# Altium PCB SQUIDCtr_Rev0.PcbDoc (part 2 of 4)
Units mil, origin at the board's own origin, x right, y up, seen from the top; angles counter-clockwise.
Board outline 5765 x 2940 mil, 6 copper layers (Top Layer, Internal Plane 1, Mid-Layer 1, InternalPlane 2, Mid-Layer 2, Bottom Layer), stack 62.5 mil thick; 583 components, 307 nets, 1511 pads, 451 vias.
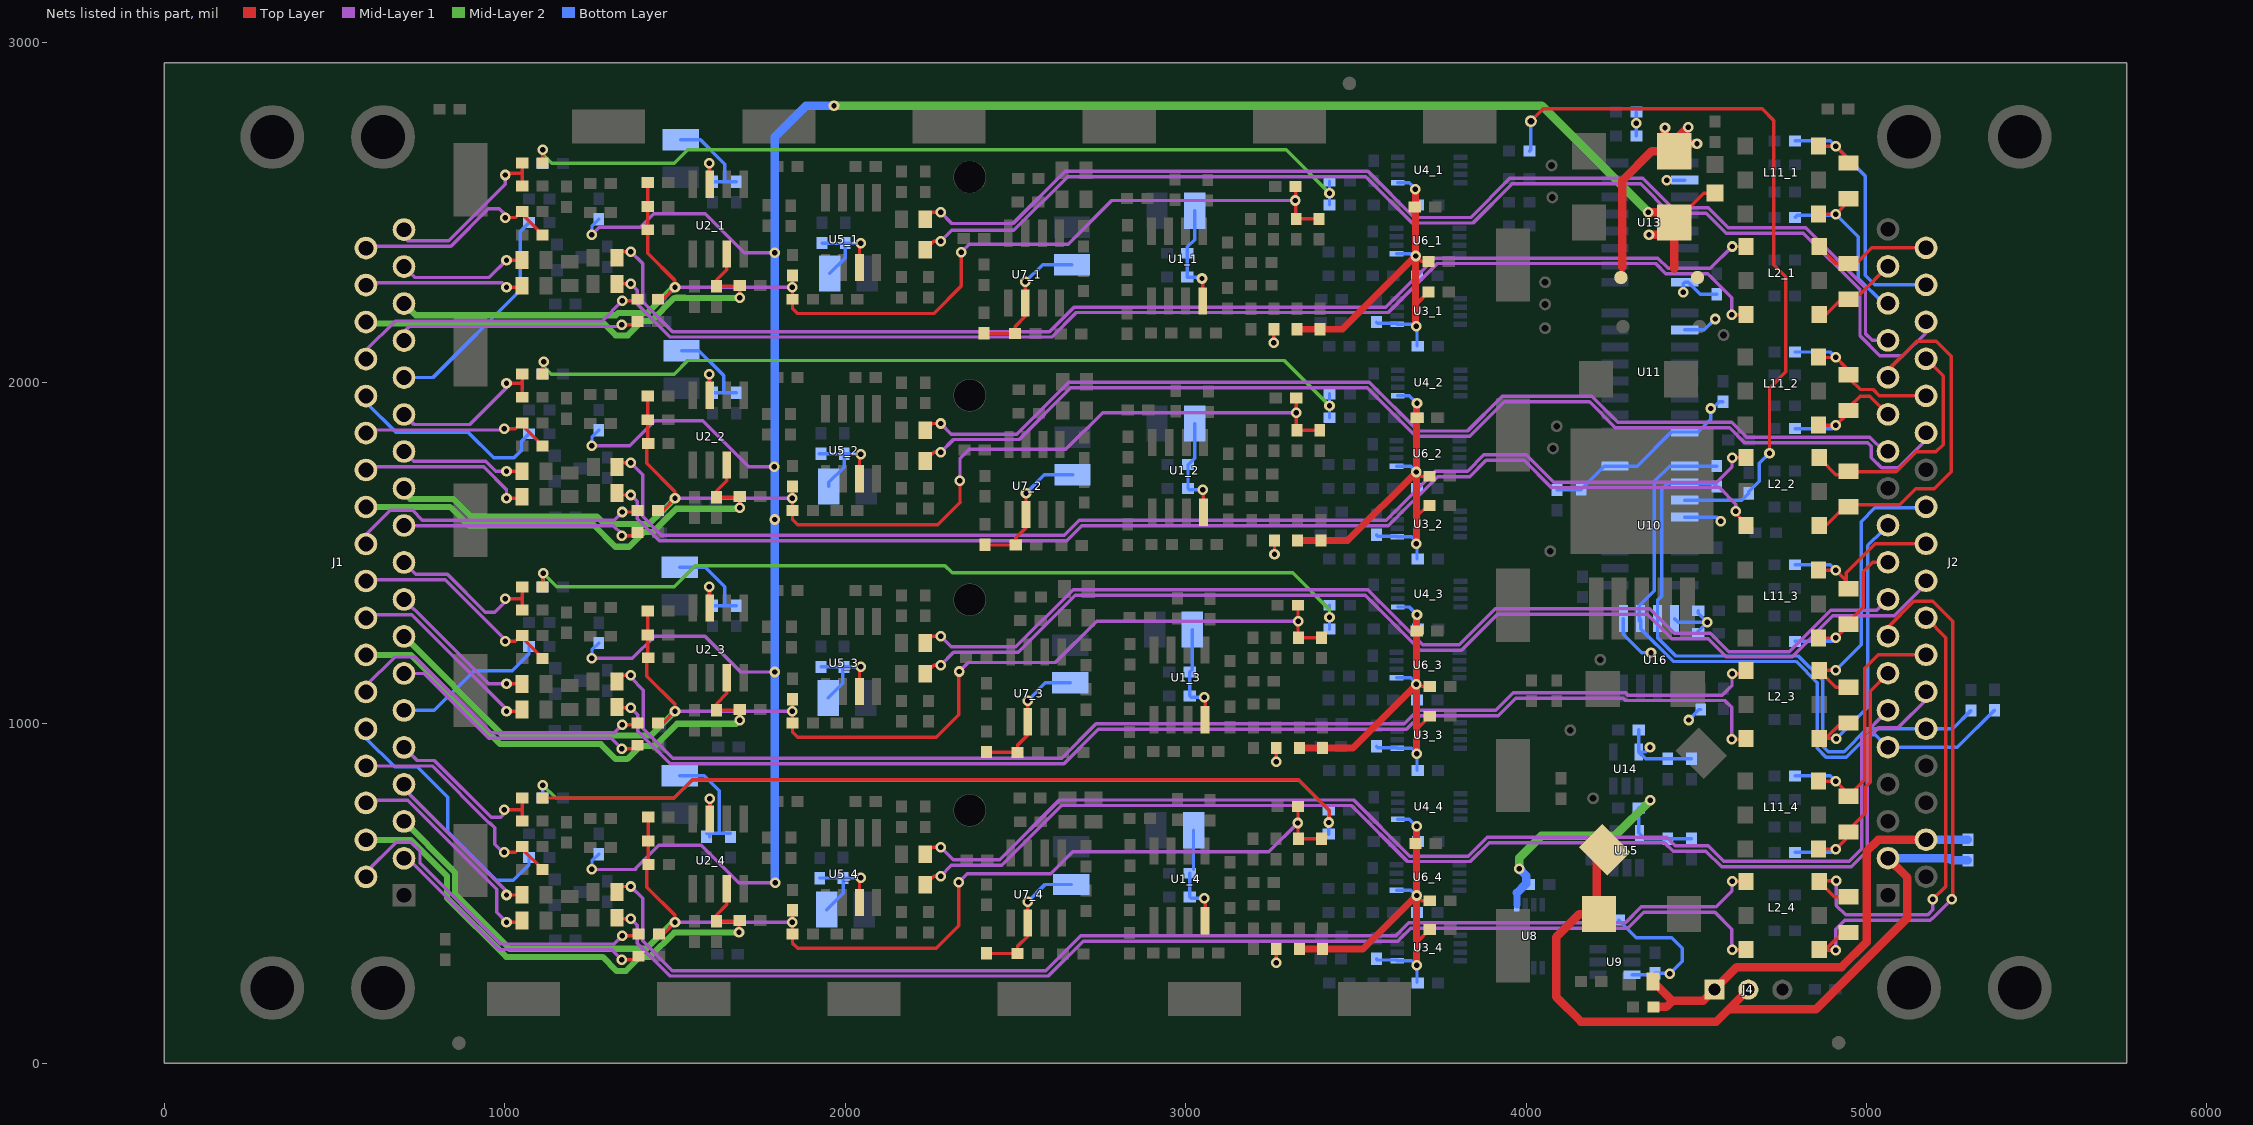
[diagram p6: the nets of this part, all layers, seen from the top]

## Footprints (in the part's own frame and the unit in brackets; to place one, negate y for a bottom-side part, rotate by r counter-clockwise, add the part's x,y. Pads: shape width x height; smd on the part's side, far side on the other; paste and mask are expansions set on the pad) (continued)
"DSUB37-F (590MILS)" [mm] "DSUB 37Pin Female - 590mils from board edge to first pin"
  rect 1.69x1.69 hole 1.09: 1(-16.566,-10.92)
  round 1.69 hole 1.09: 2(-13.806,-10.92) 3(-11.046,-10.92) 4(-8.286,-10.92) 5(-5.526,-10.92) 6(-2.766,-10.92) 7(-0.006,-10.92) 8(2.754,-10.92) 9(5.514,-10.92) 10(8.274,-10.92) 11(11.034,-10.92) 12(13.794,-10.92) 13(16.554,-10.92) 14(19.314,-10.92) 15(22.074,-10.92) 16(24.834,-10.92) 17(27.594,-10.92) 18(30.354,-10.92) 19(33.114,-10.92) 20(-15.187,-8.08) 21(-12.427,-8.08) 22(-9.667,-8.08) 23(-6.907,-8.08) 24(-4.147,-8.08) 25(-1.387,-8.08) 26(1.373,-8.08) 27(4.133,-8.08) 28(6.893,-8.08) 29(9.653,-8.08) 30(12.413,-8.08) 31(15.173,-8.08) 32(17.933,-8.08) 33(20.693,-8.08) 34(23.453,-8.08) 35(26.213,-8.08) 36(28.973,-8.08) 37(31.733,-8.08)
  round 4.76 hole 3.26: 38(-23.476,-1.095) 38(-23.476,-9.348) 39(40.024,-1.095) 39(40.024,-9.348)
  silkscreen extent -26.5,-12.5 43.15,12.91
"DSUB37-M (590MILS)" [mm] "DSUB 37Pin Male - 590mils from board edge to first pin"
  rect 1.69x1.69 hole 1.09: 1(33.112,-10.92)
  round 1.69 hole 1.09: 2(30.352,-10.92) 3(27.592,-10.92) 4(24.832,-10.92) 5(22.072,-10.92) 6(19.312,-10.92) 7(16.552,-10.92) 8(13.792,-10.92) 9(11.032,-10.92) 10(8.272,-10.92) 11(5.512,-10.92) 12(2.752,-10.92) 13(-0.008,-10.92) 14(-2.768,-10.92) 15(-5.528,-10.92) 16(-8.288,-10.92) 17(-11.048,-10.92) 18(-13.808,-10.92) 19(-16.568,-10.92) 20(31.733,-8.08) 21(28.973,-8.08) 22(26.213,-8.08) 23(23.453,-8.08) 24(20.693,-8.08) 25(17.933,-8.08) 26(15.173,-8.08) 27(12.413,-8.08) 28(9.653,-8.08) 29(6.893,-8.08) 30(4.133,-8.08) 31(1.373,-8.08) 32(-1.387,-8.08) 33(-4.147,-8.08) 34(-6.907,-8.08) 35(-9.667,-8.08) 36(-12.427,-8.08) 37(-15.187,-8.08)
  round 4.76 hole 3.26: 38(40.024,-9.348) 38(40.024,-1.095) 39(-23.476,-9.348) 39(-23.476,-1.095)
  silkscreen extent -26.5,-12.5 43.15,12.91
ELLATV [mm] "Inductor"
  rect 2.45x3 smd rot 45: 1(-3.6,-3.6) 2(3.6,3.6)
  silkscreen extent -5.5,-5.5 5.5,5.5
Fiducial_mark [mil]
  round 40 smd mask+20: 0(0,0)
  round 40 smd far side mask+20: 1(0,0)
HDR1X3_MolexVertical [mm] "WM2889"
  rect 1.5x1.5 hole 0.889: 1(0,0)
  round 1.5 hole 0.889: 2(2.54,0) 3(5.08,0)
  silkscreen extent -2.54,-3.02 7.62,1.73
MSOP-8 [mil]
  rect 40x16 smd: 1(0,0) 2(0,-25) 3(0,-50) 4(0,-75) 5(185,-75) 6(185,-50) 7(185,-25) 8(185,0)
  silkscreen extent -3,-100 150,26
"SHIELD BASE" [mil]
  rect 215x100 smd: 1(500,25)
  silkscreen extent 120,-12 380,13
"SHIELD BASE CORNER" [mil]
  rect 100x215 smd: 1(156,-381)
  silkscreen extent 118,-260 144,13
SO8#1 [mil]
  round 10 on Top Overlay: 0(-40,40)
  rect 80x26 smd: 1(0,0) 2(0,-50) 3(0,-100) 4(0,-150) 5(205,-150) 6(205,-100) 7(205,-50) 8(205,0)
  silkscreen extent -53,-180 258,30
SO8#2 [mil]
  round 10 on Bottom Overlay: 0(-40,40)
  rect 80x26 smd: 1(0,0) 2(0,-50) 3(0,-100) 4(0,-150) 5(205,-150) 6(205,-100) 7(205,-50) 8(205,0)
  silkscreen extent -53,-180 258,30
SO16 [mil]
  rect 80x26 smd: 1(0,0) 2(0,-50) 3(0,-100) 4(0,-150) 5(0,-200) 6(0,-250) 7(0,-300) 8(0,-350) 9(205,-350) 10(205,-300) 11(205,-250) 12(205,-200) 13(205,-150) 14(205,-100) 15(205,-50) 16(205,0)
  silkscreen extent -53,-380 258,53
SOT23 [mil]
  rect 36x36 smd: 1(-38,-80) 2(37,-80)
  rect 36x50 smd: 3(0,0)
  silkscreen extent -58,-85 57,5
SOT23-5 [mil]
  rect 26x50 smd: 1(-37.5,0) 2(0,0) 3(37.5,0) 4(37.5,100) 5(-37.5,100)
  silkscreen extent -83,-8 65,100
SOT23-6 [mil]
  rect 26x50 smd: 1(-37.5,0) 2(0,0) 3(37.5,0) 4(37.5,100) 5(0,100) 6(-37.5,100)
  silkscreen extent -83,-8 65,100
SRR4028 [mm]
  round 1 smd: 1(-2.02,1.912) 2(-1.87,-1.749)
  Top Layer region: -1.8,0.75 -2.65,0.75 -2.65,2.75 2.65,2.75 2.649,0.751 1.8,0.751 1.637,0.75 1.559,0.9 1.475,1.032 1.378,1.157 1.273,1.272 1.158,1.379 1.033,1.475 0.901,1.559 0.761,1.631 0.616,1.691 0.466,1.739 0.313,1.773 0.157,1.793 0,1.8 -0.156,1.793 -0.312,1.772 -0.466,1.738 -0.616,1.691 -0.761,1.631 -0.9,1.559 -1.033,1.474 -1.157,1.379 -1.273,1.273 -1.379,1.157 -1.475,1.033 -1.559,0.9 -1.631,0.762 -1.636,0.75 -1.8,0.75
  Top Layer region: 1.8,-0.751 2.651,-0.751 2.65,-2.751 -2.649,-2.752 -2.648,-0.752 -1.8,-0.752 -1.636,-0.751 -1.558,-0.901 -1.474,-1.033 -1.378,-1.158 -1.273,-1.273 -1.157,-1.38 -1.032,-1.476 -0.901,-1.56 -0.76,-1.633 -0.616,-1.692 -0.465,-1.74 -0.312,-1.774 -0.157,-1.794 0.001,-1.801 0.157,-1.795 0.313,-1.773 0.466,-1.739 0.617,-1.692 0.761,-1.632 0.901,-1.56 1.033,-1.476 1.158,-1.38 1.273,-1.274 1.38,-1.158 1.475,-1.034 1.559,-0.901 1.632,-0.763 1.636,-0.751 1.801,-0.751
TCASE-D [mm]
  rect 2.55x2.7 smd: 1(0,0) 2(6.35,0)
  silkscreen extent -1.9,-2.54 8.26,2.54
TP-3520-SK [mil]
  round 35 hole 20: 1(0,0)
  silkscreen extent -27,-28 27,27
TTWB [mil] "Transformer"
  round 10 on Top Overlay: 1(-44,-3)
  rect 50x44.88 smd: 1(0,0) 2(100,0) 3(200,0) 4(200,215) 5(100,215) 6(0,215)
  silkscreen extent -35,-33 235,248

## Part data
C1 C2 C3_1 C3_2 C3_3 C3_4 C4 C5_1 C5_2 C5_3 C5_4 C6_1 C6_2 C6_3 C6_4 C7_1 C7_2 C7_3 C7_4 C8_1 C8_2 C8_3 C8_4 C9_1 C9_2 C9_3 C9_4 C10 C11_1 C11_2 C11_3 C11_4 C12_1 C12_2 C12_3 C12_4 C13_1 C13_2 C13_3 C13_4 C14_1 C14_2 C14_3 C14_4 C15_1 C15_2 C15_3 C15_4 C16_1 C16_2 C16_3 C16_4 C17_1 C17_2 C17_3 C17_4 C18_1 C18_2 C18_3 C18_4 C19_1 C19_2 C19_3 C19_4 C20_1 C20_2 C20_3 C20_4 C21_1 C21_2 C21_3 C21_4 C22 C23 C26_1 C26_2 C26_3 C26_4 C30 C31 C32 C33 C34 C35 C36 C37 C38 C39_1 C39_2 C39_3 C39_4 C40_1 C40_2 C40_3 C40_4 C41_1 C41_2 C41_3 C41_4 C42_1 C42_2 C42_3 C42_4 C43_1 C43_2 C43_3 C43_4 C44 C45_1 C45_2 C45_3 C45_4 C46_1 C46_2 C46_3 C46_4 C47_1 C47_2 C47_3 C47_4 C48_1 C48_2 C48_3 C48_4 C49_1 C49_2 C49_3 C49_4 C50_1 C50_2 C50_3 C50_4 C51_1 C51_2 C51_3 C51_4 C52_1 C52_2 C52_3 C52_4 C53_1 C53_2 C53_3 C53_4 C54_1 C54_2 C54_3 C54_4 C55 C56 C57 C58_1 C58_2 C58_3 C58_4 C59_1 C59_2 C59_3 C59_4 C60_1 C60_2 C60_3 C60_4 C61_1 C61_2 C61_3 C61_4 C62_1 C62_2 C62_3 C62_4 C67_1 C67_2 C67_3 C67_4 C68_1 C68_2 C68_3 C68_4 C69_1 C69_2 C69_3 C69_4: library part Cap0603, "Capacitor, Ceramic, 0603"
C24 C25 C27 C28 C29: library part Tantalum, "CAP TANT CASE-D"
C63_1 C63_2 C63_3 C63_4 C64_1 C64_2 C64_3 C64_4 C65_1 C65_2 C65_3 C65_4 C66_1 C66_2 C66_3 C66_4: library part "CAP 1210", "Capacitor, Ceramic, 1210"
CS0 CS1 CS7 CS8 CS9 DEV_SCK LR LRCap MOSI REG_DEV_MOSI REG_DEV_SCK REG_SCK SPI_MISO: "TestPoint1"
DP1: library part "LED, yellow, 0805, 2mA", "LED"
J1: "DB37F"
J2: "DB37M"
J4: library part "Header 3", "3-Pin 0.1\" header"
L1_1 L1_2 L1_3 L1_4 L9_1 L9_2 L9_3 L9_4: library part Inductor0603, "Inductor 0603"
L3: "33uH 1.8A inductor 10mmx10mm"
L4 L7_1 L7_2 L7_3 L7_4 L8_1 L8_2 L8_3 L8_4: library part Inductor0603, "Inductor 0805"
L5 L6: library part InductorSRR4028, "=PartConstraints"
L11_1 L11_2 L11_3 L11_4: library part Transformer, "Transformer"
Q1_1 Q1_2 Q1_3 Q1_4: library part 2N2222, "TRANS NPN 40V 350MW SMD SOT23-3"
R1_1 R1_2 R1_3 R1_4 R2_1 R2_2 R2_3 R2_4 R3_1 R3_2 R3_3 R3_4 R5_1 R5_2 R5_3 R5_4 R10_1 R10_2 R10_3 R10_4 R55_1 R55_2 R55_3 R55_4 R57_1 R57_2 R57_3 R57_4: library part "RES 0805", "RES 0805 SMD"
R4_1 R4_2 R4_3 R4_4 R35_1 R35_2 R35_3 R35_4: library part "RES 1206", "RES 100 OHM 1/4W 1206 SMD"
R6_1 R6_2 R6_3 R6_4 R7_1 R7_2 R7_3 R7_4 R9_1 R9_2 R9_3 R9_4 R15 R16 R17 R18 R29 R31 R32 R34 R42 R43_1 R43_2 R43_3 R43_4 R46_1 R46_2 R46_3 R46_4 R47_1 R47_2 R47_3 R47_4 R50_1 R50_2 R50_3 R50_4 R61 R62 R64_1 R64_2 R64_3 R64_4 R65_1 R65_2 R65_3 R65_4 R66 R68 R73 R74 R75 R76: library part "RES 0603", "RES 0603"
R8_1 R8_2 R8_3 R8_4 R11_1 R11_2 R11_3 R11_4 R12_1 R12_2 R12_3 R12_4 R13_1 R13_2 R13_3 R13_4 R14_1 R14_2 R14_3 R14_4 R19_1 R19_2 R19_3 R19_4 R20_1 R20_2 R20_3 R20_4 R21_1 R21_2 R21_3 R21_4 R22_1 R22_2 R22_3 R22_4 R23_1 R23_2 R23_3 R23_4 R24_1 R24_2 R24_3 R24_4 R25_1 R25_2 R25_3 R25_4 R26_1 R26_2 R26_3 R26_4 R27_1 R27_2 R27_3 R27_4 R36_1 R36_2 R36_3 R36_4 R37_1 R37_2 R37_3 R37_4 R38_1 R38_2 R38_3 R38_4 R39_1 R39_2 R39_3 R39_4 R40_1 R40_2 R40_3 R40_4 R41_1 R41_2 R41_3 R41_4 R44_1 R44_2 R44_3 R44_4 R45_1 R45_2 R45_3 R45_4 R48_1 R48_2 R48_3 R48_4 R49_1 R49_2 R49_3 R49_4 R51_1 R51_2 R51_3 R51_4 R52_1 R52_2 R52_3 R52_4 R53_1 R53_2 R53_3 R53_4 R54_1 R54_2 R54_3 R54_4 R56_1 R56_2 R56_3 R56_4 R58_1 R58_2 R58_3 R58_4 R59_1 R59_2 R59_3 R59_4 R60_1 R60_2 R60_3 R60_4 R63_1 R63_2 R63_3 R63_4 R67 R69_1 R69_2 R69_3 R69_4 R70_1 R70_2 R70_3 R70_4 R71_1 R71_2 R71_3 R71_4 R72_1 R72_2 R72_3 R72_4 R77_1 R77_2 R77_3 R77_4 R78_1 R78_2 R78_3 R78_4 R79_1 R79_2 R79_3 R79_4 R80_1 R80_2 R80_3 R80_4 R81_1 R81_2 R81_3 R81_4 R82_1 R82_2 R82_3 R82_4 R83 R84 R85: library part Res0603, "RES 0603"
R28 R30 R33: library part "RES 0603", "Resistor"
SH1 SH2 SH3 SH4 SH5 SH6 SH8 SH9 SH10 SH11 SH12 SH13 SH14 SH16 SH17 SH18 SH19 SH20 SH21 SH22 SH23 SH24: library part ShieldBase
U1_1 U1_2 U1_3 U1_4: library part LMH6628, "IC OP AMP DUAL 2CH LN 8-SOIC"
U2_1 U2_2 U2_3 U2_4: "IC OPAMP R-R I/O 165MHZ 8-SOIC"
U3_1 U3_2 U3_3 U3_4 U4_1 U4_2 U4_3 U4_4 U6_1 U6_2 U6_3 U6_4: "CONV D/A 12BIT MICROPWR 8MSOP"
U5_1 U5_2 U5_3 U5_4: "IC AMP DIFF LDIST LP 95MA 8SOIC"
U7_1 U7_2 U7_3 U7_4: "Voltage Referance"
U8: library part DAC121S101, "CONV D/A 12BIT MICROPWR 8MSOP"
U9: library part ADT7301, "Digital Temperature Sensor, 13-Bit, +/-1 Degree Accurate"
U10: "IC LINE RCVR LVDS QUAD 16-SOIC"
U11 U13: "IC SHIFT REGISTER 8BIT 16-SOIC"
U12: "Low dropout regulator, single resistor, 1.1A"
U14: library part 74LVC1G17, "Single Schmitt-Trigger buffer"
U15: library part 74LVC1G07, "Single  NON-INVERTING BUFFER, Open Drain"
U16: "IC TXRX BUS LVDS SINGLE 8-SOI"

## Free pads (board coordinates)
  round 96 hole 93 unplated: 1(2366,744) 1(2366,1362) 1(2366,1963) 1(2366,2604)

## Via types
v1: diameter 31, hole 16, Top Layer to Bottom Layer, tented both sides, 451 vias

## Nets (pads, with @x,y where several pads share a name; then routed paths per layer and width w, separated by ;. In a path a pad name is that pad's centre, name@x,y a point inside that pad or via, vN(x,y) a via of type N, cw(c..) or ccw(c..) an arc to the next point about the centre after c; other vN are vias at no path point)
5V5_RAW: C24.1 J2.2 J4.2 L3.1 R18.1 | length 2237.8
  Top Layer w25: L3.1@4231.27,628.27 4207,604 4207,446 C24.1@4214,439 4156,439 4088,371 4088,196 4161,123 4559,123 4595,159 ; J4.2@4653,217 4595,159 ; J2.2@5063.08,602.87 5120,545.95 5120,428 4851,159 4595,159
  Bottom Layer w25: J2.2@5063.08,602.87 5244.13,602.87 5250,597 R18.1@5298,597
5VA: C5_1.2 C5_2.2 C5_3.2 C5_4.2 C6_1.2 C6_2.2 C6_3.2 C6_4.2 C18_1.2 C18_2.2 C18_3.2 C18_4.2 C20_1.2 C20_2.2 C20_3.2 C20_4.2 C21_1.2 C21_2.2 C21_3.2 C21_4.2 C27.1 C39_1.2 C39_2.2 C39_3.2 C39_4.2 C41_1.2 C41_2.2 C41_3.2 C41_4.2 C42_1.2 C42_2.2 C42_3.2 C42_4.2 C63_1.2 C63_2.2 C63_3.2 C63_4.2 C64_1.2 C64_2.2 C64_3.2 C64_4.2 C65_1.2 C65_2.2 C65_3.2 C65_4.2 C66_1.2 C66_2.2 C66_3.2 C66_4.2 L5.2 R12_1.1 R12_2.1 R12_3.1 R12_4.1 U1_1.8 U1_2.8 U1_3.8 U1_4.8 U2_1.7 U2_2.7 U2_3.7 U2_4.7 U5_1.3 U5_2.3 U5_3.3 U5_4.3 U7_1.2 U7_2.2 U7_3.2 U7_4.2 | length 6604.1
  Top Layer w10: v1@1596,784 v1(1602,778) U2_4.7@1602,718 ; v1(1600,1400) 1602,1398 U2_3.7@1602,1338 ; v1(1600,2025) 1602,2023 U2_2.7@1602,1963 ; v1(1600,2645) 1602,2643 U2_1.7@1602,2583 ; U5_4.3@2042,473 v1@2042,542 ; U5_3.3@2042,1093 v1@2042,1162 ; U5_2.3@2042,1718 v1@2042,1787 ; U5_1.3@2042,2338 v1@2042,2407 ; C21_1.2@2408,2145 2409,2144 C18_1.2@2499,2144 2499,2165 2529,2195 U7_1.2@2529,2234 v1(2529,2296) ; C21_2.2@2410,1524 2411,1523 C18_2.2@2501,1523 2501,1544 2531,1574 U7_2.2@2531,1613 v1(2531,1675) ; C21_4.2@2415,324 2416,323 C18_4.2@2506,323 2506,344 2536,374 U7_4.2@2536,413 v1(2536,475) ; C21_3.2@2415,915 2416,914 C18_3.2@2506,914 2506,935 2536,965 U7_3.2@2536,1004 v1(2536,1066) ; v1(3048,2306) 3050,2304 U1_1.8@3050,2240 ; v1(3050,1685) 3052,1683 U1_2.8@3052,1619 ; v1(3055,485) 3057,483 U1_4.8@3057,419 ; v1(3055,1076) 3057,1074 U1_3.8@3057,1010 ; v1(3259,2117) R12_1.1@3259,2157 ; v1(3261,1496) R12_2.1@3261,1536 ; v1(3266,296) R12_4.1@3266,336 ; v1(3266,887) R12_3.1@3266,927
  Top Layer w25: 4283,2339 4283,2594 4369,2680 C27.1@4435,2680 ; v1(4408,2749) 4408,2721 C27.1@4435,2694 ; v1(4476,2750) 4435,2709 C27.1@4435,2694 ; v1(4502,2702) 4457,2702 C27.1@4435,2680 ; C27.1@4435,2680 C27.1@4435,2694
  Bottom Layer w10: C63_4.2@1514,845.12 1585.88,845.12 1630,801 1630,676 ; C63_3.2@1514,1458.12 1588.88,1458.12 1646,1401 1646,1345 ; C63_1.2@1517,2713.12 1574.88,2713.12 1646,2642 1646,2590 ; C63_2.2@1519,2094.12 1569.88,2094.12 1643,2021 1643,1970 ; C6_4.2@1593,676 C6_4.2@1602,676 ; v1(1600,1400) 1600,1355 C6_3.2@1610,1345 1646,1345 ; v1(1600,2025) 1600,1980 C6_2.2@1610,1970 1643,1970 ; v1(1600,2645) 1600,2600 C6_1.2@1610,2590 1646,2590 ; C6_4.2@1602,666 C6_4.2@1602,676 ; v1(1602,778) C6_4.2@1602,676 ; C5_4.2@1663,676 1630,676 ; C5_3.2@1680,1345 1646,1345 ; C5_2.2@1680,1970 1643,1970 ; C5_1.2@1680,2590 1646,2590 ; C41_2.2@1924,1791 C41_2.2@1929,1791 C42_2.2@1997,1791 ; C41_4.2@1925,545 C42_4.2@1994,545 ; C41_3.2@1929,1165 C42_3.2@1996,1165 ; C41_1.2@1932,2410 C42_1.2@2000,2410 ; C64_4.2@1945.88,452 1994,500.12 C42_4.2@1994,545 ; C64_3.2@1949.88,1074 1993.19,1117.31 1993.19,1162.19 C42_3.2@1996,1165 ; C64_2.2@1951.88,1695 1951.88,1706.88 1997,1752 C42_2.2@1997,1791 ; C64_1.2@1954.88,2321 2000,2366.12 C42_1.2@2000,2410 ; v1(2045,545) C42_4.2@1994,545 ; v1(2045,1165) C42_3.2@1996,1165 ; v1@2045,1791 C42_2.2@1997,1791 ; v1(2045,2410) C42_1.2@2000,2410 ; v1(2529,2296) 2579.88,2346.88 C66_1.2@2666,2346.88 ; v1(2531,1675) 2584.88,1728.88 C66_2.2@2668,1728.88 ; v1(2536,475) 2586.88,525.88 C66_4.2@2664,525.88 ; v1(2536,1066) 2587.88,1117.88 C66_3.2@2661,1117.88 ; C39_4.2@3012,559 C20_4.2@3012,489 3016,485 v1(3055,485) ; C65_3.2@3019.12,1275 3019.12,1157.12 C39_3.2@3012,1150 C20_3.2@3012,1080 3016,1076 v1(3055,1076) ; C39_4.2@3023.12,570.12 C65_4.2@3023.12,685 ; C65_2.2@3026.12,1880 3026.12,1778.12 C39_2.2@3007,1759 C20_2.2@3007,1689 3011,1685 v1(3050,1685) ; C65_1.2@3026.12,2505 3026.12,2420.12 3005,2399 C39_1.2@3005,2380 C20_1.2@3005,2310 3044,2310 v1(3048,2306) ; C6_4.2@1602,676 1630,676
  other v1: 2045,1790
5VD: C1.2 C2.2 C10.2 C22.2 C29.1 C30.2 C31.2 C32.2 C33.2 C34.2 C35.2 C36.2 C37.2 C38.2 C44.2 DP1.1 L6.2 R15.2 R32.2 R61.2 R63_1.1 R63_2.1 R63_3.1 R63_4.1 R67.2 U8.1 U9.3 U10.4 U10.16 U11.10 U11.16 U13.10 U13.16 U14.5 U15.5 U16.5 U16.8 | length 11108.9
  Top Layer w10: C29.1@4435,2470 4521.6,2556.6 DP1.1@4554.82,2556.6
  Top Layer w25: v1(4359,2501) 4404,2501 C29.1@4435,2470 ; v1(4361,2434) 4399,2434 C29.1@4435,2470 ; 4435,2335 C29.1@4435,2470
  Mid-Layer 1 w10: v1(1256,570) 1385,570 1385,574 1452,641 1577,641 1687,531 v1(1794,531) ; v1(1256,1190) 1375,1190 1440,1255 1588,1255 1693,1150 v1(1793,1150) ; v1(1256,1815) 1367,1815 1440,1888 1581,1888 1716,1753 v1(1792,1753) ; v1(1256,2435) 1277,2456 1398,2456 1438,2496 1589,2496 1704,2381 v1(1793,2381)
  Mid-Layer 2 w25: v1@1973,2814 4046,2814 v1(4359,2501) ; v1(3980,572) 3980,604 4045,669 4261,669 v1(4365,773)
  Bottom Layer w10: v1(1256,570) 1256,595 R63_4.1@1276,615 ; v1(1256,1190) 1256,1215 R63_3.1@1276,1235 ; v1(1256,1815) 1256,1840 R63_2.1@1276,1860 ; v1(1256,2435) 1256,2460 R63_1.1@1276,2480 ; C2.2@4091,1685 4160,1685 C1.2@4162,1687 4230,1755 U10.16@4261,1755 4326,1755 4426,1855 U11.16@4466,1855 4506,1855 4506,1855.28 4543,1892.28 v1(4543,1924) ; R67.2@4272,421 4324,369 4428,369 4459,338 4459,300 v1(4422,263) 4412,263 4410,265 C30.2@4379,265 4374.5,260.5 U9.3@4311,260.5 ; U16.5@4286,1307 4286,1261 4340,1207 v1(4367,1207) ; C37.2@4324,2725 v1(4324,2762) C38.2@4324,2795 ; R32.2@4331,980 U14.5@4331,915 ; v1(4364,929) 4350,915 U14.5@4331,915 ; v1(4365,773) 4342,750 R15.2@4331,750 4331,677.5 U15.5@4333.5,675 4348.5,660 C32.2@4416,660 C31.2@4486,660 ; v1(4413,2595) U13.10@4466,2595 ; U16.8@4436,1307 4447,1296 v1(4532,1296) ; v1(4462,2265) 4462,2291 U13.16@4466,2295 4477,2295 4512,2260 C35.2@4560,2260 ; U10.4@4466,1605 4561,1605 v1@4572,1594 ; U11.10@4466,2155 4524,2155 v1(4556,2187) ; v1(4478,1009) 4509,1040 R61.2@4513,1040 ; C33.2@4486,895 C34.2@4416,895 4351,895 U14.5@4331,915 ; C10.2@4506,1264 4506,1270 v1(4532,1296) ; C44.2@4506,1330 4506,1322 v1(4532,1296) ; v1@4543,1920 4567,1944 C36.2@4578,1944
  Bottom Layer w20: U8.1@3973,466 3973,501
  Bottom Layer w25: v1@1793,531 v1(1793,1150) v1(1793,2381) 1793,2722 1884.04,2813.04 v1@1961.04,2813.04 ; 3973,501 4000,528 4000,552 v1(3980,572)
  other v1: 4572,1593 1793,1598 1967,2813.5
6V5_RAW: C4.2 J2.21 J4.1 L4.2 R18.2 | length 1372.2
  Top Layer w25: L4.2@4373,241 4430,184 ; C4.2@4374,166 4412,166 4430,184 ; J2.21@5168.89,653 J2.21@5172.53,656.64 ; J2.21@5174.89,656.64 J2.21@5172.53,656.64 ; J2.21@5174.89,659 J2.21@5172.53,656.64 ; 4430,184 4520,184 4619,283 4926.7,283 5000,356.3 5000,622.36 5034.28,656.64 J2.21@5172.53,656.64
  Bottom Layer w25: J2.21@5174.89,657.17 5175.05,657 R18.2@5298,657
CARRIER_1_N: L2_1.3 R10_1.1 | length 3595.9
  Top Layer w10: R10_1.1@1321,2290 v1(1370,2290) ; v1(4604,2200) L2_1.3@4649,2200
  Mid-Layer 1 w10: v1(1370,2290) 1389,2271 1389,2231 1486,2134 2606.63,2134 2678.63,2206 3594.63,2206 3738.63,2350 4380.37,2350 4410.37,2320 4534,2320 4604,2250 v1@4604,2201
CARRIER_1_P: L2_1.1@4646,2400 R2_1.1 | length 3625.1
  Top Layer w10: R2_1.1@1321,2360 1346,2385 v1@1364,2385 ; v1(4605,2400) L2_1.1@4650,2400
  Mid-Layer 1 w10: v1(1370,2385) 1405,2350 1405,2237.63 1492.63,2150 2600,2150 2672,2222 3588,2222 3732,2366 4387,2366 4417,2336 4540.63,2336 4540.81,2335.81 v1(4605,2400)
CARRIER_2_N: L2_2.3 R10_2.1 | length 3610.6
  Top Layer w10: R10_2.1@1321,1670 v1(1370,1670) ; v1(4616,1622) 4616,1616 L2_2.3@4652,1580
  Mid-Layer 1 w10: v1(1370,1670) 1389,1651 1389,1600.37 1453.37,1536 2334.69,1536 2650.63,1536 2694.31,1579.69 3595.69,1579.69 3740,1724 3834.63,1724 3882.31,1771.69 3994.31,1771.69 4074,1692 4566.63,1692 4566.81,1692.19 4616,1643 v1(4616,1622) v1@4617,1621
CARRIER_2_P: L2_2.1@4646,1780 R2_2.1 | length 3671.9
  Top Layer w10: R2_2.1@1321,1740 1346,1765 v1@1364,1765 ; v1(4605,1780) L2_2.1@4652,1780
  Mid-Layer 1 w10: v1(1370,1765) 1405,1730 1405,1607 1460,1552 2644,1552 2687.69,1595.69 3589.06,1595.69 3733.37,1740 3828,1740 3875.69,1787.69 4000.94,1787.69 4080.63,1708 4560,1708 4605,1753 v1(4605,1780)
CARRIER_3_N: L2_3.3 R10_3.1 | length 3608.4
  Top Layer w10: R10_3.1@1321,1045 v1(1370,1045) ; v1(4604,953) 4650,953 L2_3.3@4652,955
  Mid-Layer 1 w10: v1(1370,1045) 1391,1024 1391,976.37 1486.37,881 2642.63,881 2743.31,981.69 3648.69,981.69 3689,1022 3918,1022 3969,1073 4286,1073 4292.69,1066.31 4583.69,1066.31 4604,1046 v1@4604,956
CARRIER_3_P: L2_3.1@4646,1155 R2_3.1 | length 3647.8
  Top Layer w10: R2_3.1@1321,1115 1346,1140 v1@1364,1140 ; v1(4606,1145) 4642,1145 L2_3.1@4652,1155
  Mid-Layer 1 w10: v1(1370,1140) 1370,1134 1407,1097 1407,983 1493,897 2636,897 2736.69,997.69 3642.06,997.69 3682.37,1038 3911.37,1038 3962.37,1089 4292.63,1089 4299.31,1082.31 4576.6,1082.31 4605,1110.72 v1@4605,1155
CARRIER_4_N: L2_4.3 R10_4.1 | length 3588
  Top Layer w10: R10_4.1@1321,425 v1(1370,425) ; v1(4605,334) 4651,334 L2_4.3@4652,335
  Mid-Layer 1 w10: v1(1370,425) 1389,406 1389,352.72 1479.72,262 1480.37,262 1485.37,257 2596,257 2698.69,359.69 3623.31,359.69 3661.31,397.69 4298.69,397.69 4345,444 4555,444 4604,395 v1@4604,336
CARRIER_4_P: L2_4.1@4646,535 R2_4.1 | length 3631.1
  Top Layer w10: R2_4.1@1321,495 1346,520 v1@1364,520 ; v1(4605,535) L2_4.1@4652,535
  Mid-Layer 1 w10: v1(1370,520) 1405,485 1405,360 1492,273 2589.37,273 2692.06,375.69 3616.69,375.69 3654.69,413.69 4292.06,413.69 4338.37,460 4553.31,460 ; 4558,460 4605,507 v1(4605,535)
CH1_CRYO.BOLO_N: J1.36 R5_1.1 | length 469.5
  Top Layer w10: v1(1005,2280) 1046,2280 R5_1.1@1051,2285
  Mid-Layer 1 w10: J1.36@589,2293 992,2293 v1(1005,2280)
CH1_CRYO.BOLO_P: J1.18 R1_1.1 | length 381.5
  Top Layer w10: v1(1005,2360) R1_1.1@1051,2360
  Mid-Layer 1 w10: J1.18@703.92,2341.04 735.96,2309 954,2309 v1(1005,2360)
CH1_CRYO.HEATER_P: J1.15 R7_1.1 | length 656.9
  Bottom Layer w10: J1.15@703.92,2015.06 789.06,2015.06 1045,2271 1045,2444 R7_1.1@1071,2470
CH1_CRYO.SQUID_BIAS_N: J1.34 R82_1.1 | length 885.7
  Top Layer w10: v1(1345,2240) 1385,2240 R82_1.1@1390,2245
  Mid-Layer 1 w10: J1.34@592.11,2069.35 592.11,2095.11 678,2181 1286,2181 v1(1345,2240)
CH1_CRYO.SQUID_BIAS_P: J1.16 R81_1.2 | length 724.7
  Top Layer w10: v1(1343,2170) 1380,2170 R81_1.2@1390,2180
  Mid-Layer 1 w10: J1.16@703.92,2123.72 703.92,2149.92 719,2165 1338,2165 v1(1343,2170)
CH1_CRYO.SQUID_COIL_N: J1.37 R36_1.2 R48_1.1 | length 626
  Top Layer w10: v1(1001,2485) 1031,2485 1051,2505 1051,2495 R48_1.1@1111,2435
  Mid-Layer 1 w10: J1.37@592.11,2395.33 597.78,2401 842,2401 952,2511 984,2511 1001,2494 v1(1001,2485)
CH1_CRYO.SQUID_COIL_P: J1.19 R19_1.2 R38_1.2 | length 531.1
  Top Layer w10: v1@1010,2610 1015,2615 1051,2615 R38_1.2@1051,2645 ; R19_1.2@1051,2575 1051,2610
  Mid-Layer 1 w10: J1.19@703.92,2449.7 703.92,2428.08 715,2417 835.37,2417 1001,2582.63 1001,2601 v1@1010,2610
  other v1: 1001,2610
CH1_CRYO.SQUID_SENSE_N: C8_1.2 C9_1.2 C45_1.2 C60_1.2 J1.17 L9_1.1 R52_1.1 R53_1.2 R56_1.2 R82_1.2 | length 3514
  Top Layer w10: R53_1.2@1420,2449 1420,2380 1500,2300 v1(1500,2280) 1465,2245 R82_1.2@1450,2245 ; 1420,2468 C9_1.2@1420,2518 C8_1.2@1420,2588 ; R56_1.2@1845,2315 v1(1845,2280) R52_1.1@1845,2245 1845,2219 1861,2203 2260,2203 2340.83,2283.83 v1(2340.83,2383) ; C60_1.2@3323,2576 3323,2483 L9_1.1@3325,2481 C45_1.2@3392,2481
  Mid-Layer 1 w10: v1(1500,2280) v1(1845,2280) ; v1(2340.83,2383) 2364.83,2407 2655,2407 2783,2535 v1(3322,2535)
  Mid-Layer 2 w18: J1.17@703.92,2232.38 738.3,2198 1326,2198 1333,2205 1420,2205 1488,2273 1493,2273 v1(1500,2280)
CH1_CRYO.SQUID_SENSE_P: J1.35 R51_1.2 R72_1.2 U2_1.3 | length 1368.3
  Top Layer w10: U2_1.3@1652,2378 1652,2332 1622,2302 R51_1.2@1622,2283 1688,2283 1690,2281 v1(1690,2249)
  Mid-Layer 2 w18: J1.35@592.11,2178.01 596.12,2174 1291,2174 1326,2139 1361,2139 1403,2181 1429.94,2181 1497.94,2249 1503.87,2249 1504.37,2249.5 1529.63,2249.5 1530.13,2249 v1(1690,2249)
CH1_MEZZ.BIAS_N: J2.18 L2_1.4 R4_1.2 | length 254.7
  Top Layer w10: L2_1.4@4867,2200 4880,2200 4940,2260 4981.62,2260 J2.18@5063.08,2341.46
CH1_MEZZ.BIAS_P: J2.37 L2_1.6 R4_1.1 | length 352
  Top Layer w10: L2_1.6@4867,2400 4867,2393 4910,2350 4970,2350 5015.91,2395.91 J2.37@5174.72,2395.91 ; J2.37@5174.89,2395.75 J2.37@5174.72,2395.91 ; J2.37@5174.89,2395.91 J2.37@5174.72,2395.91
CH1_MEZZ.NULLER_N: J2.17 L11_1.4 R35_1.2 R39_1.1 | length 565.9
  Top Layer w10: L11_1.4@4865,2495 v1(4910,2495) 4940,2525 R35_1.2@4940,2546
  Bottom Layer w10: R39_1.1@4790,2485 4797,2492 4907,2492 v1(4910,2495) 4976,2429 4976,2306.72 5049.92,2232.8 J2.17@5063.08,2232.8
CH1_MEZZ.NULLER_P: J2.36 L11_1.6 R11_1.1 R35_1.1 | length 836.4
  Top Layer w10: L11_1.6@4865,2695 4866,2694 v1(4909,2694) 4940,2663 R35_1.1@4940,2646
  Bottom Layer w10: R11_1.1@4790,2710 4893,2710 v1(4909,2694) 4996,2607 4996,2315 5023.91,2287.09 J2.36@5174.89,2287.09
CH1_MEZZ.SQUID_OUT_N: J2.16 R55_1.2 | length 3293.8
  Top Layer w10: R55_1.2@2235,2480 2255,2500 v1(2280,2500)
  Mid-Layer 1 w10: v1(2280,2500) 2312.5,2467.5 2492.87,2467.5 2646.37,2621 3535.63,2621 3671.63,2485 3837.37,2485 3952.37,2600 4343.28,2600 4429.28,2514 4535.28,2514 4594.28,2455 4821,2455 4997,2279 4997,2143.63 5016.49,2124.13 J2.16@5063.08,2124.13
CH1_MEZZ.SQUID_OUT_P: J2.35 R57_1.2 | length 3481
  Top Layer w10: R57_1.2@2235,2390 2260,2415 v1(2280,2415)
  Mid-Layer 1 w10: v1(2280,2415) 2312.5,2447.5 2495.5,2447.5 2653,2605 3529,2605 3665,2469 3844,2469 3959,2584 4336.66,2584 4422.66,2498 4528.66,2498 4587.66,2439 4814.37,2439 4981,2272.37 4981,2137 5039,2079 5107,2079 5174.89,2146.89 J2.35@5174.89,2178.43
CH2_CRYO.BOLO_N: J1.31 R5_2.1 | length 511.6
  Top Layer w10: v1(1005,1660) R5_2.1@1046,1660
  Mid-Layer 1 w10: J1.31@592.11,1743.36 601.75,1753 938,1753 1005,1686 v1(1005,1660)
CH2_CRYO.BOLO_P: J1.13 R1_2.1 | length 371
  Top Layer w10: v1(1005,1740) R1_2.1@1051,1740
  Mid-Layer 1 w10: J1.13@703.92,1797.73 732.66,1769 944.63,1769 973.63,1740 v1(1005,1740)
CH2_CRYO.HEATER_P: J1.33 R7_2.1 | length 592
  Bottom Layer w10: J1.33@592.11,1942.89 681.5,1853.5 892.5,1853.5 967,1779 1027,1779 1049,1801 1049,1828 R7_2.1@1071,1850
CH2_CRYO.SQUID_BIAS_N: J1.29 R82_2.1 | length 878.8
  Top Layer w10: v1(1345,1620) 1385,1620 R82_2.1@1390,1625
  Mid-Layer 1 w10: J1.29@592.11,1526.04 592.11,1553.11 664,1625 729,1625 758,1596 1321,1596 v1(1345,1620)
CH2_CRYO.SQUID_BIAS_P: J1.11 R81_2.2 | length 706.3
  Top Layer w10: v1(1343,1550) 1380,1550 R81_2.2@1390,1560
  Mid-Layer 1 w10: J1.11@703.92,1580.41 704.33,1580 1319,1580 1343,1556 v1(1343,1550)
CH2_CRYO.SQUID_COIL_N: J1.32 R36_2.2 R48_2.1 | length 579.4
  Top Layer w10: v1(998,1865) 1031,1865 1051,1885 1051,1875 R48_2.1@1111,1815
  Mid-Layer 1 w10: J1.32@592.11,1852.02 601.09,1861 994,1861 v1(998,1865) v1@1010,1865
CH2_CRYO.SQUID_COIL_P: J1.14 R19_2.2 R38_2.2 | length 485.3
  Top Layer w10: v1@1010,1990 1018,1998 1051,1998 ; R19_2.2@1051,1955 R38_2.2@1051,2025
  Mid-Layer 1 w10: J1.14@703.92,1906.39 733.32,1877 897,1877 1005,1985 v1(1005,1998)
CH2_CRYO.SQUID_SENSE_N: C8_2.2 C9_2.2 C45_2.2 C60_2.2 J1.12 L9_2.1 R52_2.1 R53_2.2 R56_2.2 R82_2.2 | length 3572.6
  Top Layer w10: R53_2.2@1417,1813 1417,1763 1500,1680 v1(1500,1660) 1465,1625 R82_2.2@1450,1625 ; C8_2.2@1420.07,1961.07 C9_2.2@1420.07,1891.07 1420.07,1821.93 R53_2.2@1421,1821 ; R56_2.2@1845,1695 v1(1845,1660) R52_2.1@1845,1625 1845,1599 1861,1583 2272,1583 2337.83,1648.83 2337,1649.67 v1(2337,1712) ; C60_2.2@3325,1955 v1(3325,1912) 3325,1862 L9_2.1@3327,1860 C45_2.2@3394,1860
  Mid-Layer 1 w10: v1(1500,1660) v1(1845,1660) ; v1(2337,1712) 2337,1777 2364,1804 2648,1804 2756,1912 v1(3325,1912)
  Mid-Layer 2 w18: J1.12@703.92,1689.07 703.92,1677.08 722.3,1658.7 849.24,1658.7 901.94,1606 1270.94,1606 1291.94,1585 1425,1585 v1(1500,1660)
CH2_CRYO.SQUID_SENSE_P: J1.30 R51_2.2 R72_2.2 U2_2.3 | length 1402.1
  Top Layer w10: U2_2.3@1652,1758 1652,1712 1622,1682 R51_2.2@1622,1663 1688,1663 R72_2.2@1690,1665 v1(1690,1633)
  Mid-Layer 2 w18: J1.30@592.11,1634.7 839.3,1634.7 893,1581 1262,1581 1325,1518 1365,1518 1408,1561 1434.94,1561 1503.44,1629.5 1686.5,1629.5 v1(1690,1633)
CH2_MEZZ.BIAS_N: J2.15 L2_2.4 R4_2.2 | length 1048.4
  Top Layer w10: L2_2.4@4867,1580 4880,1580 4940,1640 4941.22,1641.22 5097.22,1641.22 5144,1688 5199,1688 5249,1738 5249,2078 5205,2122 5148,2122 5063.08,2037.08 J2.15@5063.08,2015.47
CH2_MEZZ.BIAS_P: J2.34 L2_2.6 R4_2.1 | length 691.8
  Top Layer w10: L2_2.6@4867,1780 4867,1773 4910,1730 4970,1730 4977.76,1737.76 5086.76,1737.76 5146,1797 5204,1797 5225,1818 5225,2019.65 J2.34@5174.89,2069.76
CH2_MEZZ.NULLER_N: J2.14 L11_2.4 R35_2.2 R39_2.1 | length 393.5
  Top Layer w10: L11_2.4@4865,1875 v1(4910,1875) 4940,1905 4940,1929 4950,1929 4981,1960 5009.89,1960 J2.14@5063.08,1906.81
  Bottom Layer w10: R39_2.1@4790,1865 4900,1865 v1(4910,1875)
CH2_MEZZ.NULLER_P: J2.33 L11_2.6 R11_2.1 R35_2.1 | length 502.6
  Top Layer w10: L11_2.6@4865,2075 4866,2074 v1(4909,2074) 4940,2043 4940,2009 4952,2009 4981,1980 5019,1980 5037.9,1961.1 J2.33@5174.89,1961.1
  Bottom Layer w10: R11_2.1@4790,2090 4893,2090 v1(4909,2074)
CH2_MEZZ.SQUID_OUT_N: J2.13 R55_2.2 | length 3080.8
  Top Layer w10: R55_2.2@2235,1860 2255,1880 v1(2280,1880)
  Mid-Layer 1 w10: v1(2280,1880) 2311.19,1848.81 2311.37,1849 2504,1849 2656,2001 3539.63,2001 3682.63,1858 3827.87,1858 3929.87,1960 4193,1960 4269,1884 4604.28,1884 4648.28,1840 5010,1840 5051.85,1798.15 J2.13@5063.08,1798.15
CH2_MEZZ.SQUID_OUT_P: J2.32 R57_2.2 | length 3284.8
  Top Layer w10: R57_2.2@2235,1770 2260,1795 v1(2280,1795)
  Mid-Layer 1 w10: v1(2280,1795) 2318,1833 2510.63,1833 2662.63,1985 3533,1985 3676,1842 3834.5,1842 3936.5,1944 4186.37,1944 4262.37,1868 4597.66,1868 4641.66,1824 5003.37,1824 5014,1813.37 5014,1780 5044,1750 5093,1750 5174.89,1831.89 J2.32@5174.89,1852.44
CH3_CRYO.BOLO_N: J1.27 R5_3.1 | length 577.9
  Top Layer w10: v1(1005,1035) R5_3.1@1046,1035
  Mid-Layer 1 w10: J1.27@592.11,1308.72 601.39,1318 727,1318 1005,1040 v1(1005,1035)
CH3_CRYO.BOLO_P: J1.9 R1_3.1 | length 449.8
  Top Layer w10: v1(1005,1115) R1_3.1@1051,1115
  Mid-Layer 1 w10: J1.9@703.92,1363.09 733.01,1334 733.63,1334 952.63,1115 v1(1005,1115)
CH3_CRYO.HEATER_P: J1.6 R7_3.1 | length 457.8
  Bottom Layer w10: J1.6@703.92,1037.1 793.1,1037.1 910,1154 1022,1154 1071,1203 R7_3.1@1071,1225
CH3_CRYO.SQUID_BIAS_N: J1.25 R82_3.1 | length 955.1
  Top Layer w10: v1(1345,995) 1385,995 R82_3.1@1390,1000
  Mid-Layer 1 w10: J1.25@592.11,1091.39 592.11,1109.11 677,1194 736.63,1194 959.63,971 1321,971 v1(1345,995)
CH3_CRYO.SQUID_BIAS_P: J1.7 R81_3.2 | length 781.7
  Top Layer w10: v1(1343,925) 1380,925 R81_3.2@1390,935
  Mid-Layer 1 w10: J1.7@703.92,1145.76 762.24,1145.76 953,955 1313,955 v1(1343,925)
CH3_CRYO.SQUID_COIL_N: J1.28 R36_3.2 R48_3.1 | length 647.5
  Top Layer w10: v1(1001,1240) 1031,1240 1051,1260 1051,1250 R48_3.1@1111,1190
  Mid-Layer 1 w10: J1.28@592.11,1417.38 595.73,1421 825,1421 1006,1240 v1@1010,1240
CH3_CRYO.SQUID_COIL_P: J1.10 R19_3.2 R38_3.2 | length 498.9
  Top Layer w10: v1(1001,1365) 1051,1365 ; R19_3.2@1051,1330 R38_3.2@1051,1400
  Mid-Layer 1 w10: J1.10@703.92,1471.75 738.67,1437 831.63,1437 942.63,1326 971,1326 1001,1356 v1(1001,1365)
CH3_CRYO.SQUID_SENSE_N: C8_3.2 C9_3.2 C45_3.2 C60_3.2 J1.8 L9_3.1 R52_3.1 R53_3.2 R56_3.2 R82_3.2 | length 3648
  Top Layer w10: R53_3.2@1417,1188 1417,1138 1500,1055 v1(1500,1035) 1465,1000 R82_3.2@1450,1000 ; C8_3.2@1420,1329 C9_3.2@1420,1259 1420,1193 R53_3.2@1421,1192 ; R56_3.2@1845,1070 v1(1845,1035) R52_3.1@1845,1000 1845,974 1861,958 2267,958 2333,1024 v1@2333,1154 ; C60_3.2@3330,1346 3330,1253 L9_3.1@3332,1251 C45_3.2@3399,1251
  Mid-Layer 1 w10: v1(1500,1035) v1(1845,1035) ; v1(2335.5,1151.5) 2362,1178 2617,1178 2738.5,1299.5 v1(3330.5,1299.5)
  Mid-Layer 2 w18: J1.8@703.92,1254.43 995.35,963 1428,963 v1(1500,1035)
CH3_CRYO.SQUID_SENSE_P: J1.26 R51_3.2 R72_3.2 U2_3.3 | length 1480.1
  Top Layer w10: U2_3.3@1652,1133 1652,1087 1622,1057 R51_3.2@1622,1038 1688,1038 R72_3.2@1690,1040 v1(1690,1008)
  Mid-Layer 2 w18: J1.26@592.11,1200.06 723.94,1200.06 986,938 1282,938 1326,894 1359,894 1397.5,932.5 1440.5,932.5 1506,998 1680,998 v1(1690,1008)
CH3_MEZZ.BIAS_N: J2.11 L2_3.4 R4_3.2 | length 797.3
  Top Layer w10: L2_3.4@4867,955 L2_3.4@4880,955 ; v1(4911,954) 4910,955 L2_3.4@4880,955 ; R4_3.2@4947,1000 4925,1000 L2_3.4@4880,955
  Bottom Layer w10: v1(4911,954) 5004,1047 5004,1521.75 J2.11@5047.13,1564.87
CH3_MEZZ.BIAS_P: J2.30 L2_3.6 R4_3.1 | length 823.6
  Top Layer w10: v1(4909,1155) 4867,1155 4867,1148 4910,1105 R4_3.1@4947,1105
  Bottom Layer w10: v1(4909,1155) 4984,1230 4984,1592 5024.5,1632.5 5172.27,1632.5 J2.30@5174.89,1635.12
CH3_MEZZ.NULLER_N: J2.10 L11_3.4 R35_3.2 R39_3.1 | length 484.4
  Top Layer w10: L11_3.4@4865,1250 v1(4910,1250) 4940,1280 4940,1295.83 4945.83,1295.83 4990,1340 4990,1444 5018.17,1472.17 J2.10@5063.08,1472.17
  Bottom Layer w10: R39_3.1@4790,1240 4900,1240 v1(4910,1250)
CH3_MEZZ.NULLER_P: J2.29 L11_3.6 R11_3.1 R35_3.1 | length 530.2
  Top Layer w10: L11_3.6@4865,1450 4866,1449 v1(4909,1449) 4940,1418 ; R35_3.1@4940,1395 4940,1418 ; J2.29@5174.89,1526.46 5025.46,1526.46 4940,1441 4940,1418
  Bottom Layer w10: R11_3.1@4790,1465 4893,1465 v1(4909,1449)
CH3_MEZZ.SQUID_OUT_N: J2.9 R55_3.2 | length 3145.5
  Top Layer w10: R55_3.2@2235,1235 2255,1255 v1(2280,1255)
  Mid-Layer 1 w10: v1(2280,1255) 2311.19,1223.81 2311.37,1224 2501.37,1224 2669.37,1392 3534.63,1392 3696.31,1230.31 3803.69,1230.31 3909.37,1336 4362.93,1336 4434.93,1264 4541.63,1264 4595.63,1210 4773.37,1210 4894.37,1331 5030.57,1331 J2.9@5063.08,1363.5
CH3_MEZZ.SQUID_OUT_P: J2.28 R57_3.2 | length 3296.4
  Top Layer w10: R57_3.2@2235,1145 2260,1170 v1(2280,1170)
  Mid-Layer 1 w10: v1(2280,1170) 2318,1208 2508,1208 2676,1376 3528,1376 3689.69,1214.31 3810.31,1214.31 3916,1320 4356.3,1320 4428.3,1248 4535,1248 4589,1194 4780,1194 4901,1315 5081,1315 5174.89,1408.89 J2.28@5174.89,1417.8
CH4_CRYO.BOLO_N: J1.22 R5_4.1 | length 645.4
  Top Layer w10: v1(1005,415) R5_4.1@1046,415
  Mid-Layer 1 w10: J1.22@592.11,765.41 599.7,773 715.49,773 976,512.49 976,444 v1(1005,415)
CH4_CRYO.BOLO_P: J1.4 R1_4.1 | length 495.5
  Top Layer w10: v1(1005,495) R1_4.1@1051,495
  Mid-Layer 1 w10: J1.4@703.92,819.78 703.92,807.2 1005,506.12 v1(1005,495)
CH4_CRYO.HEATER_P: J1.24 R7_4.1 | length 778.3
  Bottom Layer w10: J1.24@592.11,982.73 592.11,955.89 676.5,871.5 743,871.5 832,782.5 832,681 975,538 1025,538 1071,584 R7_4.1@1071,605
CH4_CRYO.SQUID_BIAS_N: J1.20 R82_4.1 | length 1004.3
  Top Layer w10: v1(1345,375) 1385,375 R82_4.1@1390,380
  Mid-Layer 1 w10: J1.20@592.11,548.09 592.11,561.11 681,650 724,650 751,623 751,588.63 988.63,351 1319.63,351 1320.31,350.31 v1(1345,375)
CH4_CRYO.SQUID_BIAS_P: J1.2 R81_4.2 | length 813.4
  Top Layer w10: v1(1343,305) 1380,305 R81_4.2@1390,315
  Mid-Layer 1 w10: J1.2@703.92,602.46 714.54,602.46 982,335 1313,335 v1(1343,305)
CH4_CRYO.SQUID_COIL_N: J1.23 R36_4.2 R48_4.1 | length 695.4
  Top Layer w10: v1(999,620) 1031,620 1051,640 1051,630 R48_4.1@1111,570
  Mid-Layer 1 w10: J1.23@592.11,874.07 592.18,874 786.37,874 953.37,707 955,707 970,692 970,644 994,620 v1(999,620)
CH4_CRYO.SQUID_COIL_P: J1.5 R19_4.2 R38_4.2 | length 518.1
  Top Layer w10: v1(999,745) 1051,745 ; R19_4.2@1051,710 R38_4.2@1051,780
  Mid-Layer 1 w10: J1.5@703.92,928.44 742.36,890 793,890 960,723 988,723 1000,735 v1@1000,745
CH4_CRYO.SQUID_SENSE_N: C8_4.2 C9_4.2 C45_4.2 C60_4.2 J1.3 L9_4.1 R52_4.1 R53_4.2 R56_4.2 R82_4.2 | length 3733.7
  Top Layer w10: 1417,568 1417,518 1500,435 v1(1500,415) 1465,380 R82_4.2@1450,380 ; C8_4.2@1421,724 C9_4.2@1421,654 1421,586 R53_4.2@1422,585 ; R56_4.2@1845,450 v1(1845,415) R52_4.1@1845,380 1845,354 1861,338 2267,338 2334,405 v1(2334,532) ; C60_4.2@3330,755 3330,662 L9_4.1@3332,660 C45_4.2@3399,660
  Mid-Layer 1 w10: v1(1500,415) v1(1845,415) ; v1(2334,532) 2359,557 2604,557 2668.5,621.5 3244,621.5 v1(3329,706.5)
  Mid-Layer 2 w18: J1.3@703.92,711.12 843,572.04 843,571.94 854,560.94 854,496.94 1013.94,337 1416.06,337 1487.56,408.5 1493.5,408.5 v1(1500,415)
CH4_CRYO.SQUID_SENSE_P: J1.21 R51_4.2 R72_4.2 U2_4.3 | length 1548.2
  Top Layer w10: U2_4.3@1652,513 1652,467 1622,437 R51_4.2@1622,418 R72_4.2@1688,418 ; v1(1688,386) R72_4.2@1688,418 ; R72_4.2@1690,420 R72_4.2@1688,418
  Mid-Layer 2 w18: J1.21@592.11,656.75 724.25,656.75 830,551 830,487 1004,313 1287,313 1328,272 1356,272 1397,313 1426,313 1497.5,384.5 1686.5,384.5 v1(1688,386)
CH4_MEZZ.BIAS_N: J2.8 L2_4.4 R4_4.2 | length 1670
  Top Layer w10: v1(4910,333) 4869,333 4867,335 4880,335 R4_4.2@4940,395 ; J2.8@5063.08,1254.84 5063.08,1281.08 5139.4,1357.4 5194.88,1357.4 5253,1299.28 5253,485 v1(5250,482)
  Mid-Layer 1 w10: v1(4910,333) 4910,395 4935.57,420.57 5187.2,420.57 5193.63,427 5194.71,427 v1@5249.86,482.14
CH4_MEZZ.BIAS_P: J2.27 L2_4.6 R4_4.1 | length 1419.9
  Top Layer w10: v1(4911,537) 4869,537 4867,535 4867,528 4905,490 R4_4.1@4947,490 ; J2.27@5174.89,1309.13 5233,1251.02 5233,520 v1(5195,482)
  Mid-Layer 1 w10: v1(4911,537) 4911,464 4938.43,436.57 5180.57,436.57 5195,451 v1(5195,482)
CH4_MEZZ.NULLER_N: J2.7 L11_4.4 R35_4.2 R39_4.1 | length 758.1
  Top Layer w10: L11_4.4@4865,630 v1(4910,630) 4940,660 4940,695 4956,695 4996,735 4996,811.37 5011,826.37 5011,1094.1 J2.7@5063.08,1146.18
  Bottom Layer w10: R39_4.1@4790,620 4900,620 v1(4910,630)
CH4_MEZZ.NULLER_P: J2.26 L11_4.6 R11_4.1 R35_4.1 | length 806
  Top Layer w10: L11_4.6@4865,830 4866,829 v1(4909,829) R35_4.1@4940,798 ; R35_4.1@4947,785 4995,833 4995,1161 5034.47,1200.47 J2.26@5174.89,1200.47
  Bottom Layer w10: R11_4.1@4790,845 4893,845 v1(4909,829)
CH4_MEZZ.SQUID_OUT_N: J2.6 R55_4.2 | length 3422
  Top Layer w10: R55_4.2@2235,615 2255,635 v1(2280,635)
  Mid-Layer 1 w10: v1(2280,635) 2317,598 2453.37,598 2629.37,774 3493.63,774 3658.31,609.31 3829.69,609.31 3885.37,665 4413.28,665 4438.28,640 4535,640 4581,594 4949,594 4986,631 4986,960.44 J2.6@5063.08,1037.52
CH4_MEZZ.SQUID_OUT_P: J2.25 R57_4.2 | length 3576.3
  Top Layer w10: R57_4.2@2235,525 2260,550 v1(2280,550)
  Mid-Layer 1 w10: v1(2280,550) 2312,582 2460,582 2636,758 3487,758 3651.69,593.31 3836.31,593.31 3892,649 4406.66,649 4431.66,624 4528.37,624 4574.37,578 4955.63,578 5002,624.37 5002,953.81 5035.19,987 5093,987 5174.89,1068.89 J2.25@5174.89,1091.81
DAC_VREF_1: C11_1.1 C12_1.1 C14_1.2 C16_1.2 C67_1.2 C68_1.2 C69_1.2 L1_1.1 R25_1.2 U3_1.1 U4_1.1 U6_1.1 | length 1313.7
  Top Layer w10: v1@3675.5,2168.5 v1(3678,2166) ; 3675.5,2234 3681,2234 C68_1.2@3713,2266 ; v1(3675.5,2372) 3691.5,2356 C69_1.2@3713,2356
  Top Layer w20: L1_1.1@3327,2157 C16_1.2@3395,2157 3460.5,2157 v1(3675.5,2372) ; v1@3675.5,2168.5 3675.5,2234 v1(3675.5,2372) ; v1@3675.5,2568.5 v1(3675.5,2372)
  Bottom Layer w10: R25_1.2@3560.5,2178 3564.5,2174 3619.5,2174 U3_1.1@3621.5,2172 3663.5,2172 ; U6_1.1@3619.5,2379 3661.5,2379 3675.5,2365 3675.5,2318 C14_1.2@3679.5,2314 ; U4_1.1@3622.5,2587 3656.5,2587 3675.5,2568 3675.5,2529 C12_1.1@3682.5,2522 ; C11_1.1@3679.5,2108 v1@3679.5,2156
  other v1: 3675,2568.5
DAC_VREF_2: C11_2.1 C12_2.1 C14_2.2 C16_2.2 C67_2.2 C68_2.2 C69_2.2 L1_2.1 R25_2.2 U3_2.1 U4_2.1 U6_2.1 | length 1338.3
  Top Layer w10: 3678,1606 3711,1639 C68_2.2@3716,1639 ; v1@3678,1737.5 3690.5,1725 C69_2.2@3716,1725 ; v1@3678,1935 v1@3682,1939
  Top Layer w20: L1_2.1@3329,1536 C16_2.2@3397,1536 3476,1536 v1(3677.5,1737.5) ; v1(3678,1527) 3678,1606 3678,1737.5 v1@3678,1935
  Bottom Layer w10: R25_2.2@3560.5,1553 3564.5,1549 3619.5,1549 U3_2.1@3621.5,1547 3663.5,1547 3679.5,1531 C11_2.1@3679.5,1483 ; U6_2.1@3619.5,1754 3661.5,1754 v1@3677.75,1737.75 ; U4_2.1@3622.5,1962 3656.5,1962 v1(3679.5,1939) v1@3682.5,1936 ; C12_2.1@3678,1896 v1@3678,1935 ; C14_2.2@3679.5,1689 v1@3679.5,1736
DAC_VREF_3: C11_3.1 C12_3.1 C14_3.2 C16_3.2 C67_3.2 C68_3.2 C69_3.2 L1_3.1 R25_3.2 U3_3.1 U4_3.1 U6_3.1 | length 1315.9
  Top Layer w10: 3678.5,981.5 C68_3.2@3717,1020 ; v1@3678.5,1317 v1(3679.5,1318) ; v1@3684,1108 C69_3.2@3717,1108
  Top Layer w20: L1_3.1@3334,927 C16_3.2@3402,927 3492,927 v1@3678,1113 ; v1(3678.5,909.5) 3678.5,981.5 v1@3678.5,1317
  Bottom Layer w10: R25_3.2@3560.5,932 3564.5,928 3619.5,928 U3_3.1@3621.5,926 3663.5,926 3679.5,910 C11_3.1@3679.5,862 ; U6_3.1@3619.5,1133 3661.5,1133 v1@3679.25,1115.25 ; U4_3.1@3622.5,1341 3656.5,1341 v1(3679.5,1318) 3679.5,1279 C12_3.1@3682.5,1276 ; C14_3.2@3679.5,1068 v1@3679.5,1113.5
  other v1: 3677.5,1113.5
DAC_VREF_4: C11_4.1 C12_4.1 C14_4.2 C16_4.2 C67_4.2 C68_4.2 C69_4.2 L1_4.1 R25_4.2 U3_4.1 U4_4.1 U6_4.1 | length 1315
  Top Layer w10: 3678.5,355.5 C68_4.2@3717,394 ; v1(3678.5,493.5) 3694,478 C69_4.2@3717,478
  Top Layer w20: L1_4.1@3334,336 C16_4.2@3402,336 3521,336 v1(3678.5,493.5) ; v1(3678.5,288.5) 3678.5,355.5 v1(3678.5,493.5) ; v1(3678.5,696.5) v1(3678.5,493.5)
  Bottom Layer w10: R25_4.2@3560.5,308 3564.5,304 3619.5,304 U3_4.1@3621.5,302 3663.5,302 3679.5,286 C11_4.1@3679.5,238 ; U6_4.1@3619.5,509 3661.5,509 v1@3677.75,492.75 ; U4_4.1@3622.5,717 3656.5,717 3679.5,694 3679.5,655 C12_4.1@3682.5,652 ; C14_4.2@3679.5,444 v1@3679.5,491
DEV_SCK: DEV_SCK.1 R28.2 R33.1 U10.3 | length 2183.6
  Top Layer w10: DEV_SCK.1@4014,2768 4049.99,2803.99 4694,2803.99 4728,2769.99 4728,2346 4763,2311 4763,2032 4715,1984 v1(4715,1793)
  Bottom Layer w10: R28.2@4010,2680 4014,2684 DEV_SCK.1@4014,2768 ; U10.3@4466,1655 4634,1655 R33.1@4654,1675 4654,1679.79 4685,1710.79 4685,1763 v1(4715,1793)
DEV_SCLK_MISO_N: J2.5 R74.1 R84.2 U10.1 U16.6 | length 2073.5
  Bottom Layer w10: U16.6@4333,1301 4333,1345 4377,1389 4377,1710 4422,1755 U10.1@4466,1755 R74.1@4560,1755 ; U16.6@4336,1282.79 U16.6@4336,1307 ; U16.6@4337,1301 4337,1276.37 4432.37,1181 4793,1181 4855,1119 4855,926 4881,900 4940.63,900 5006.63,966 5026.1,966 J2.5@5063.08,929.02 5267.02,929.02 R84.2@5376,1038
DEV_SCLK_MISO_P: J2.24 R74.2 R83.2 U10.2 U16.7 | length 1838.1
  Bottom Layer w10: R74.2@4560,1695 4550,1705 U10.2@4466,1705 4416,1705 4398,1687 4398,1373 4386,1361 U16.7@4386,1307 4386,1250 4439,1197 4799.63,1197 4871,1125.63 4871,932.63 4887.63,916 4934,916 5001.31,983.31 J2.24@5174.89,983.31 5253.31,983.31 R83.2@5307,1037
FLUX_BIAS_FILTERED_1: C26_1.1 C46_1.1 R23_1.2 R38_1.1 | length 2552.9
  Top Layer w10: R38_1.1@1111,2645 1112,2646 v1(1112,2684)
  Mid-Layer 2 w10: v1(1112,2684) 1112,2671 1138,2645 1498,2645 1537,2684 3295.5,2684 v1(3422.5,2557)
  Bottom Layer w10: C26_1.1@1111,2644 1111,2683 v1(1112,2684) ; C46_1.1@3422.5,2522 v1(3422.5,2557) R23_1.2@3422.5,2592
FLUX_BIAS_FILTERED_2: C26_2.1 C46_2.1 R23_2.2 R38_2.1 | length 2547.6
  Top Layer w10: R38_2.1@1111,2025 1111,2057 v1(1115,2061)
  Mid-Layer 2 w10: v1(1115,2061) 1115,2047 1137,2025 1498,2025 1538,2065 3289.5,2065 v1(3422.5,1932)
  Bottom Layer w10: C26_2.1@1111,2025 1111,2057 v1(1115,2061) ; C46_2.1@3422.5,1897 v1(3422.5,1932) R23_2.2@3422.5,1967
FLUX_BIAS_FILTERED_3: C26_3.1 C46_3.1 R23_3.2 R38_3.1 | length 2579.1
  Top Layer w10: R38_3.1@1111,1400 1111,1438 v1(1113,1440)
  Mid-Layer 2 w10: v1(1113,1440) 1153,1400 1498,1400 1560,1462 2293,1462 2314,1441 3315,1441 3422.5,1333.5 v1(3422.5,1311)
  Bottom Layer w10: C26_3.1@1111,1400 1111,1438 v1(1113,1440) ; C46_3.1@3422.5,1276 v1(3422.5,1311) R23_3.2@3422.5,1346
FLUX_BIAS_FILTERED_4: C26_4.1 C46_4.1 R23_4.2 R38_4.1 | length 4931.9
  Top Layer w10: R38_4.1@1111,780 1498,780 1551,833 3332,833 3422.5,742.5 3422.5,710 v1(3420.5,708)
  Mid-Layer 2 w10: v1(1112,817) 1149,780 1498,780 1550.5,832.5 3332,832.5 3420.5,744 v1(3420.5,708)
  Bottom Layer w10: C26_4.1@1111,780 1112,781 v1(1112,817) ; C46_4.1@3420.5,674 v1(3420.5,708) R23_4.2@3420.5,744